# EAGLE board carterasp cobracasses 2 v3 (EAGLE 9.6.2)
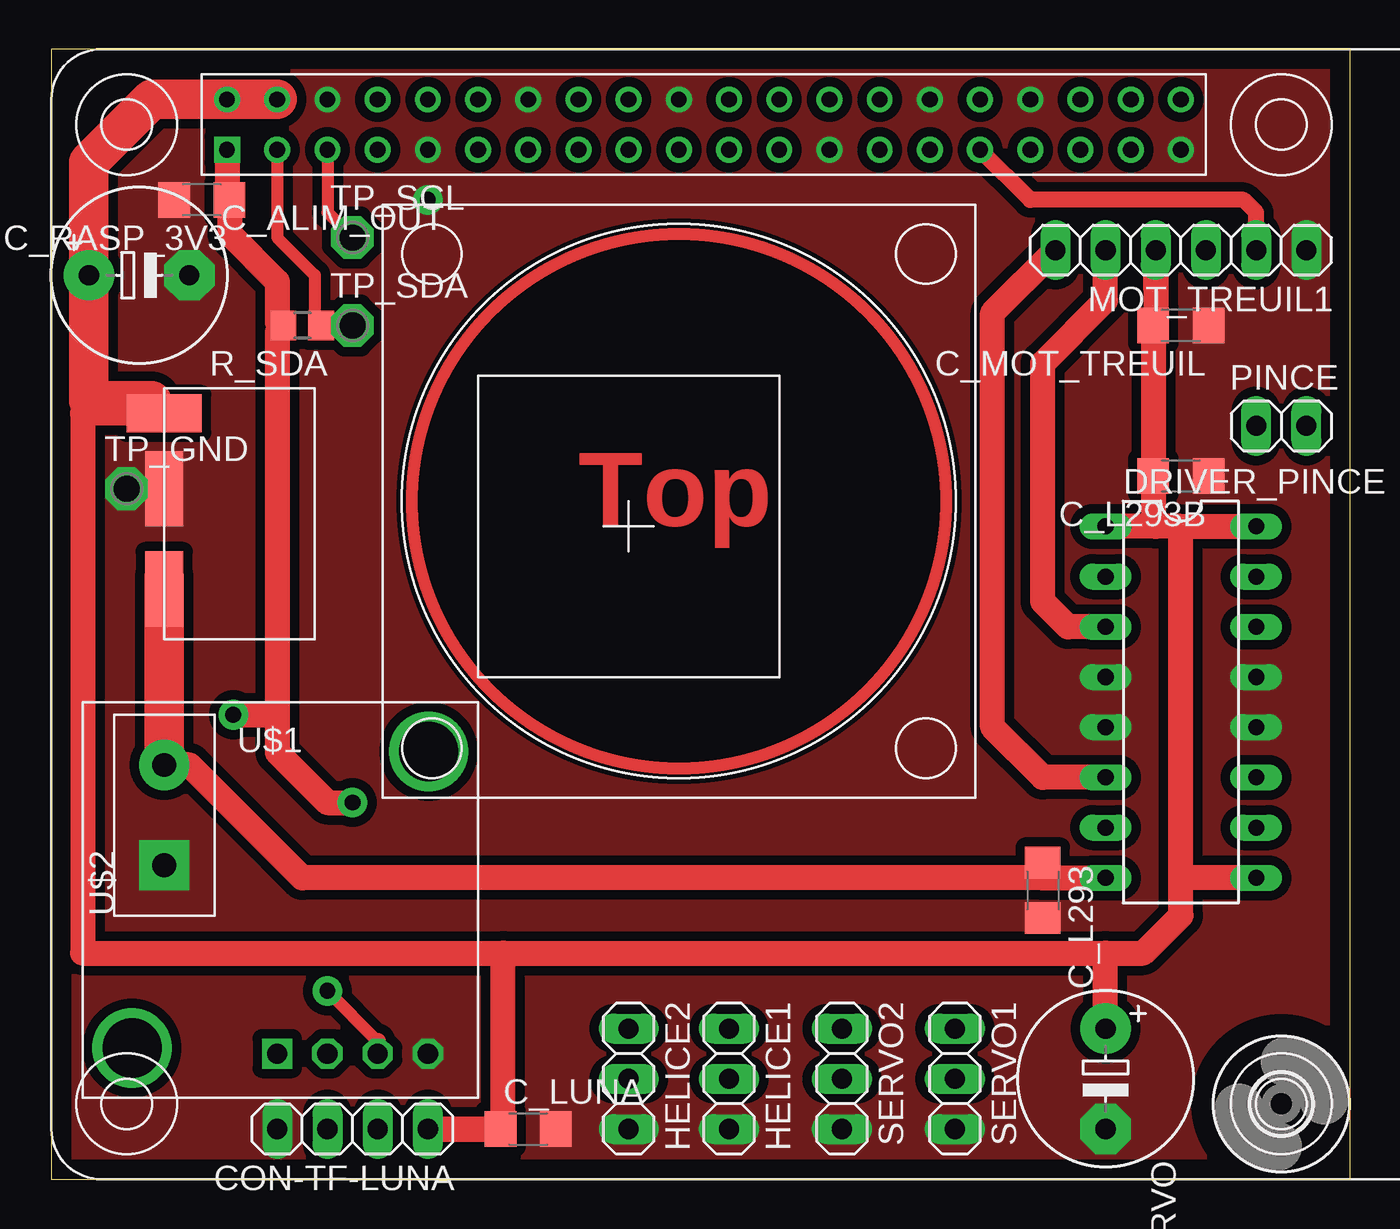
[diagram p0: board, top side]
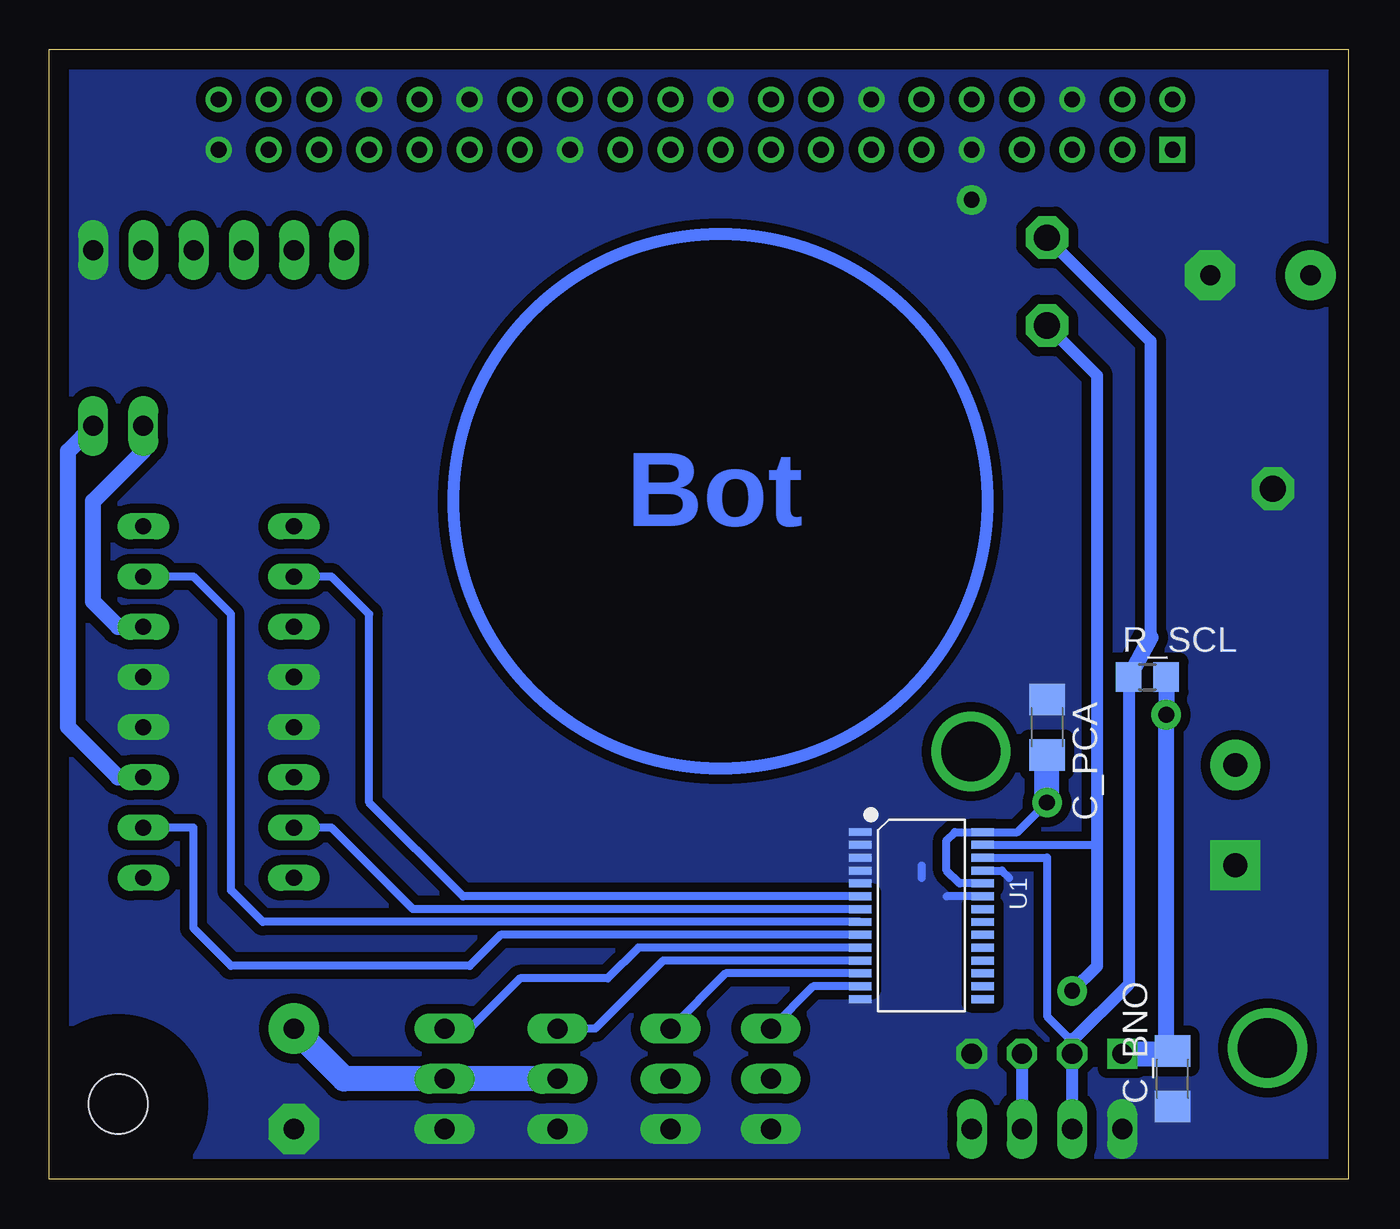
[diagram p1: board, bottom side, seen from below]

Size 65.71 x 57.14 mm. Coordinates in mm from the lower left corner, seen from the top.
Outline: 0,0 65.71,0 65.71,57.14 0,57.14 0,0
Copper layers (1*16): Top 0.035mm / dielectric 1.5mm / Bottom 0.035mm
Design rules "default": minimum track width 10mil, minimum drill 24mil, track to track 8mil, track to pad 8mil, pad to pad 8mil, via to via 8mil, smd to smd 8mil, copper to edge 40mil, drill to drill 8mil, minimum pad ring 10mil, minimum via ring 8mil, stop-mask expansion 4mil, vias tented up to drill 0mil, thermal gap 10mil

## Footprints (pad centres in the part's own frame; a part is rotated, then mirrored left to right if it is on the bottom)
E5-8,5 = drill 1.016 pad 2.54: + -2.54,0 | drill 1.016 pad 2.54 octagon: - 2.54,0
C1206 = smd 1.6 x 1.8: 1 -1.4,0; 2 1.4,0
1X04 = drill 1.016 long: 1 -3.81,0; 2 -1.27,0; 3 1.27,0; 4 3.81,0
DIL16 = drill 0.813 long: 1 -8.89,-3.81; 2 -6.35,-3.81; 3 -3.81,-3.81; 4 -1.27,-3.81; 5 1.27,-3.81; 6 3.81,-3.81; 7 6.35,-3.81; 8 8.89,-3.81; 9 8.89,3.81; 10 6.35,3.81; 11 3.81,3.81; 12 1.27,3.81; 13 -1.27,3.81; 14 -3.81,3.81; 15 -6.35,3.81; 16 -8.89,3.81
3,0 = hole 3: 0,0
1X03 = drill 1.016 long: 1 -2.54,0; 2 0,0; 3 2.54,0
1X06 = drill 1.016 long: 1 -6.35,0; 2 -3.81,0; 3 -1.27,0; 4 1.27,0; 5 3.81,0; 6 6.35,0
1X02 = drill 1.016 long: 1 -1.27,0; 2 1.27,0
R0805 = smd 1.3 x 1.5: 1 -0.95,0; 2 0.95,0
P1-13 = drill 1.321 pad 2.159 octagon: TP 0,0
TSSOP28-0.65-9.7X4.4MM = smd 0.4 x 1.15: 1 -3.59,-3.1; 2 -2.94,-3.1; 3 -2.29,-3.1; 4 -1.64,-3.1; 5 -0.99,-3.1; 6 -0.34,-3.1; 7 0.31,-3.1; 8 0.96,-3.1; 9 1.61,-3.1; 10 2.26,-3.1; 11 2.91,-3.1; 12 3.56,-3.1; 13 4.21,-3.1; 14 4.86,-3.1; 15 4.86,3.1; 16 4.21,3.1; 17 3.56,3.1; 18 2.91,3.1; 19 2.26,3.1; 20 1.61,3.1; 21 0.96,3.1; 22 0.31,3.1; 23 -0.34,3.1; 24 -0.99,3.1; 25 -1.64,3.1; 26 -2.29,3.1; 27 -2.94,3.1; 28 -3.59,3.1
MODULE_BNO055 = drill 1.016 pad 1.5 square: P$1 10.16,17.78 | drill 1.016 pad 1.5 octagon: P$2 7.62,17.78; P$3 5.08,17.78; P$4 2.54,17.78 | drill 3: P$5 17.5,17.5; P$6 2.5,2.5
CONN_ALIM = drill 1.2 pad 2.54 square: P$1 -2.54,0 | drill 1.2 pad 2.54: P$2 2.54,0
RP5 = drill 0.8 square: 3V3_1 -25.4,21.59 | drill 0.8: 3V3_2 -5.08,21.59; 5V_1 -25.4,24.13; 5V_2 -22.86,24.13; CE0_GPIO8 2.54,24.13; CE1_GPIO7 5.08,24.13; GEN4_GPIO23 -7.62,24.13; GEN5_GPIO24 -5.08,24.13; GEN6_GPIO25 0,24.13; GND_1 -15.24,21.59; GND_2 5.08,21.59; GND_3 22.86,21.59; GND_4 -10.16,24.13; GND_5 -2.54,24.13; GND_6 10.16,24.13; GND_7 15.24,24.13; GND_8 -20.32,24.13; GPIO2_SDA -22.86,21.59; GPIO3_SCL -20.32,21.59; GPIO4_GPCKL0 -17.78,21.59; GPIO5 10.16,21.59; GPIO6 12.7,21.59; GPIO9_MISO 0,21.59; GPIO10_MOSI -2.54,21.59; GPIO11_SCLK 2.54,21.59; GPIO12 12.7,24.13; GPIO13 15.24,21.59; GPIO16 17.78,24.13; GPIO17_GEN0 -12.7,21.59; GPIO18 -12.7,24.13; GPIO19 17.78,21.59; GPIO20 20.32,24.13; GPIO21 22.86,24.13; GPIO22_GEN3 -7.62,21.59; GPIO26 20.32,21.59; GPIO27_GEN2 -10.16,21.59; ID_SC 7.62,24.13; ID_SD 7.62,21.59; RXD0_GPIO15 -15.24,24.13; TXD0_GPIO14 -17.78,24.13
OKL_T6_W12 = smd 3.81 x 1.93: GND 7.62,0; V_IN 2.54,0 | smd 1.93 x 3.81: V_OUT 11.43,0

## Placement (x,y rotation side)
C_ALIM_OUT  10uF  [E5-8,5]  4.45,45.72 0 top
C_BNO  1e-7F  [C1206]  8.89,5.08 90 bottom
C_L293  1e-6  [C1206]  50.16,14.61 270 top
C_L293B  1e-7F  [C1206]  57.15,35.56 180 top
C_LUNA  1e-7F  [C1206]  24.13,2.54 0 top
C_MOT_TREUIL  1e-7F  [C1206]  57.15,43.18 180 top
C_PCA  1e-7F  [C1206]  15.24,22.86 270 bottom
C_RASP_3V3  1e-7F  [C1206]  7.62,49.53 180 top
C_SERVO  10uF  [E5-8,5]  53.34,5.08 270 top
CON-TF-LUNA  [1X04]  15.24,2.54 180 top
DRIVER_PINCE  L293D  [DIL16]  57.15,24.13 270 top
H1  MOUNT-HOLE3.0  [3,0]  62.23,3.81 0 top
HELICE1  [1X03]  34.29,5.08 270 top
HELICE2  [1X03]  29.21,5.08 270 top
MOT_TREUIL1  [1X06]  57.15,46.99 180 top
PINCE  [1X02]  62.23,38.1 0 top
R_SCL  4.7kOhm  [R0805]  10.16,25.4 0 bottom
R_SDA  4.7kOhm  [R0805]  12.7,43.18 180 top
SERVO1  [1X03]  45.72,5.08 270 top
SERVO2  [1X03]  40.01,5.08 270 top
TP_GND  TPPAD1-13  [P1-13]  3.81,34.92 0 top
TP_SCL  TPPAD1-13  [P1-13]  15.24,47.62 0 top
TP_SDA  TPPAD1-13  [P1-13]  15.24,43.18 0 top
U1  DRIVER-PCA9685PW(TSSOP28)  [TSSOP28-0.65-9.7X4.4MM]  21.59,13.97 270 bottom
U$1  MODULE_BNO055  [MODULE_BNO055]  21.59,24.13 180 top
U$2  CONN_ALIM  [CONN_ALIM]  5.72,18.41 90 top
U$3  RASPBERRY_PI5  [RP5]  34.29,30.48 0 top
U$4  OKL_T6_W12  [OKL_T6_W12]  5.72,27.3 90 top
U$5  VENTILLATEUR_RASP  [VENTILLATEUR_RASP]  31.75,34.29 0 top

## Library data of the parts
C_ALIM_OUT C_BNO C_L293 C_L293B C_LUNA C_MOT_TREUIL C_PCA C_RASP_3V3 C_SERVO R_SCL R_SDA = rcl
CON-TF-LUNA HELICE1 HELICE2 MOT_TREUIL1 PINCE SERVO1 SERVO2 = pinhead
DRIVER_PINCE = st-microelectronics; MPN: L293D; OC_FARNELL: 9589619; OC_NEWARK: 56P8249
H1 = holes
TP_GND TP_SCL TP_SDA = testpad
U1 = DRIVER-PCA9685PW_TSSOP28_; AVAILABILITY: In Stock; CHECK_PRICES: https://www.snapeda.com/parts/PCA9685PW/NXP+Semiconductors/view-part/?ref=eda; DESCRIPTION: LED Driver IC 16 Output Linear - PWM Dimming 25mA 28-TSSOP; MF: NXP USA; MP: PCA9685PW; PACKAGE: None; PRICE: None; SNAPEDA_LINK: https://www.snapeda.com/parts/PCA9685PW/NXP+Semiconductors/view-part/?ref=snap
U$1 U$2 = lib_ens_aj_v1
U$3-U$5 = shadokos_lib_raspberry

## Nets
+3V3: C_BNO.2 C_PCA.2 C_RASP_3V3.1 R_SCL.2 R_SDA.2 U1.24 U1.28 U$1.P$1 U$3.3V3_1
+5V: C_ALIM_OUT.+ C_L293B.2 C_LUNA.1 C_MOT_TREUIL.2 C_SERVO.+ CON-TF-LUNA.1 DRIVER_PINCE.1 DRIVER_PINCE.9 DRIVER_PINCE.16 MOT_TREUIL1.4 SERVO1.2 SERVO2.2 U$3.5V_1 U$3.5V_2 U$4.V_OUT
CODEUR_MOT_TREUIL: MOT_TREUIL1.2 U$3.GPIO6
GND: C_ALIM_OUT.- C_BNO.1 C_L293.2 C_L293B.1 C_LUNA.2 C_MOT_TREUIL.1 C_PCA.1 C_RASP_3V3.2 C_SERVO.- CON-TF-LUNA.4 DRIVER_PINCE.4 DRIVER_PINCE.5 DRIVER_PINCE.12 DRIVER_PINCE.13 HELICE1.3 HELICE2.3 MOT_TREUIL1.1 SERVO1.3 SERVO2.3 TP_GND.TP U1.1 U1.2 U1.3 U1.4 U1.5 U1.14 U1.23 U1.25 U$1.P$4 U$2.P$1 U$3.GND_1 U$3.GND_2 U$3.GND_3 U$3.GND_4 U$3.GND_5 U$3.GND_6 U$3.GND_7 U$3.GND_8 U$4.GND
MOT_PINCE+: DRIVER_PINCE.10 U1.9
MOT_PINCE-: DRIVER_PINCE.15 U1.8
MOT_TREUIL+: DRIVER_PINCE.7 U1.7
MOT_TREUIL-: DRIVER_PINCE.2 U1.6
N$4: DRIVER_PINCE.3 MOT_TREUIL1.5
N$6: DRIVER_PINCE.14 PINCE.1
N$8: SERVO1.1 U1.10
N$9: SERVO2.1 U1.11
N$10: HELICE1.1 U1.12
N$11: HELICE2.1 U1.13
N$12: DRIVER_PINCE.11 PINCE.2
N$15: DRIVER_PINCE.6 MOT_TREUIL1.6
PWM_DIR1: U$3.GPIO4_GPCKL0
SCL_3V: CON-TF-LUNA.3 R_SCL.1 TP_SCL.TP U1.26 U$1.P$2 U$3.GPIO3_SCL
SDA_3V: CON-TF-LUNA.2 R_SDA.1 TP_SDA.TP U1.27 U$1.P$3 U$3.GPIO2_SDA
VBAT: C_L293.1 DRIVER_PINCE.8 U$2.P$2 U$4.V_IN

## Tracks (layer width: path | path; a pad name or v marks a point on that pad's centre or on a via)
+3V3  (via drill 0.8 pad 1.5)
  Top 1.27: U$3.3V3_1 8.89,49.66 C_RASP_3V3.1 9.02,47.81 11.43,45.4 11.43,43.34 R_SDA.2 11.43,42.86 11.43,23.5 | 11.43,23.5 11.43,21.59 13.97,19.05 v15.24,19.05 | v9.21,23.5 11.43,23.5
  Bottom 0.406: v15.24,19.05 16.73,17.56 U1.28 19.91,17.56 20.32,17.14 20.32,15.61 19.67,14.96 U1.24
  Bottom 0.813: U$1.P$1 9.21,6.35 v9.21,23.5 R_SCL.2
  Bottom 1.27: v15.24,19.05 C_PCA.2 | U$1.P$1 9.02,6.35 C_BNO.2
+5V
  Top 1.27: 5.08,39.37 U$4.V_OUT 1.59,38.73 1.59,11.43 22.86,11.43 | DRIVER_PINCE.9 57.15,15.24 | 57.15,15.24 57.15,33.02 | 57.15,33.02 55.88,33.02 | 55.88,33.02 DRIVER_PINCE.1 | 57.15,33.02 DRIVER_PINCE.16 | C_LUNA.1 CON-TF-LUNA.1 22.86,2.54 22.86,11.43 | 55.88,45.09 MOT_TREUIL1.4 55.88,43.31 C_MOT_TREUIL.2 C_L293B.2 55.75,33.15 55.88,33.02 | 57.15,15.24 57.15,13.34 55.24,11.43 53.34,11.43 | 22.86,11.43 53.34,11.43 | C_SERVO.+ 53.34,11.43
  Top 2: U$3.5V_2 U$3.5V_1 5.08,54.61 1.91,51.44 C_ALIM_OUT.+ 1.91,39.37 5.08,39.37
  Bottom 1.27: SERVO2.2 SERVO1.2 50.8,5.08 C_SERVO.+
CODEUR_MOT_TREUIL
  Top 0.813: MOT_TREUIL1.2 60.96,48.9 60.32,49.53 49.53,49.53 U$3.GPIO6
GND  (via drill 0.8 pad 1.5)
  Bottom 0.406: U1.23 20.32,14.31 | 21.59,15.88 21.59,15.24 | U1.25 17.52,15.61 17.15,15.24
  other vias: 19.05,49.53
  pour Bottom (isolate 0.48, no thermals): 0,0 66.04,0 66.04,57.15 0,57.15
  pour Top (isolate 0.48, no thermals): 0,0 66.04,0 66.04,57.15 0,57.15
MOT_PINCE+
  Bottom 0.406: U1.9 42.88,12.36 44.45,10.79 56.52,10.79 58.42,12.7 58.42,17.78 DRIVER_PINCE.10
MOT_PINCE-
  Bottom 0.406: U1.8 54.92,13.01 56.52,14.61 56.52,28.57 58.42,30.48 DRIVER_PINCE.15
MOT_TREUIL+
  Bottom 0.406: DRIVER_PINCE.7 51.43,17.78 47.32,13.66 U1.7
MOT_TREUIL-
  Bottom 0.406: U1.6 44.79,14.31 49.53,19.05 49.53,28.57 51.43,30.48 DRIVER_PINCE.2
N$4
  Top 1.27: DRIVER_PINCE.3 51.43,27.94 50.16,29.21 50.16,41.27 53.34,44.45 MOT_TREUIL1.5
N$6
  Bottom 0.813: DRIVER_PINCE.14 62.23,27.94 63.5,29.21 63.5,34.29 60.96,36.83 PINCE.1
N$8
  Bottom 0.406: U1.10 35.91,11.71 37.46,10.16 41.91,10.16 44.45,7.62 SERVO1.1
N$9
  Bottom 0.406: U1.11 34.66,11.06 38.1,7.62 SERVO2.1
N$10
  Bottom 0.406: U1.12 31.5,10.41 HELICE1.1
N$11
  Bottom 0.406: U1.13 27.07,9.76 HELICE2.1
N$12
  Bottom 0.813: DRIVER_PINCE.11 62.23,20.32 64.77,22.86 64.77,36.83 PINCE.2
N$15
  Top 1.27: DRIVER_PINCE.6 50.16,20.32 47.63,22.86 47.63,43.81 MOT_TREUIL1.6
SCL_3V
  Top 0.61: U$3.GPIO3_SCL 13.97,48.9 TP_SCL.TP
  Bottom 0.406: U1.26 15.24,16.26 15.24,8.26 13.97,6.99
  Bottom 0.61: U$1.P$2 CON-TF-LUNA.3 | TP_SCL.TP 10.01,42.39 10.01,27.39 | R_SCL.1 11.11,9.85 13.97,6.99
  Bottom 0.813: 13.97,6.99 U$1.P$2 | 10.01,27.39 R_SCL.1
SDA_3V  (via drill 0.8 pad 1.5)
  Top 0.61: U$3.GPIO2_SDA 11.43,47.62 13.34,45.72 13.34,43.49 R_SDA.1 | 15.24,43.81 TP_SDA.TP | 16.51,6.99 v13.97,9.53
  Top 0.813: U$1.P$3 16.51,6.99
  Top 1.27: 13.97,43.18 R_SDA.1 TP_SDA.TP
  Bottom 0.406: U1.27 12.7,16.91
  Bottom 0.61: U$1.P$3 CON-TF-LUNA.2 | v13.97,9.53 12.7,10.79 12.7,16.91 12.7,40.64 TP_SDA.TP
VBAT
  Top 1.27: 50.16,15.24 DRIVER_PINCE.8 | C_L293.1 50.16,15.24 | 50.16,15.24 12.7,15.24 6.98,20.95 U$2.P$2
  Top 2: U$2.P$2 U$4.V_IN 5.72,30.48
(copper drawn outside any net)
  shapes: Bottom circle x1, Top circle x1

## Text on the board
Top: Top
Bottom: Bot